# EAGLE board STMsch (EAGLE 9.5.2)
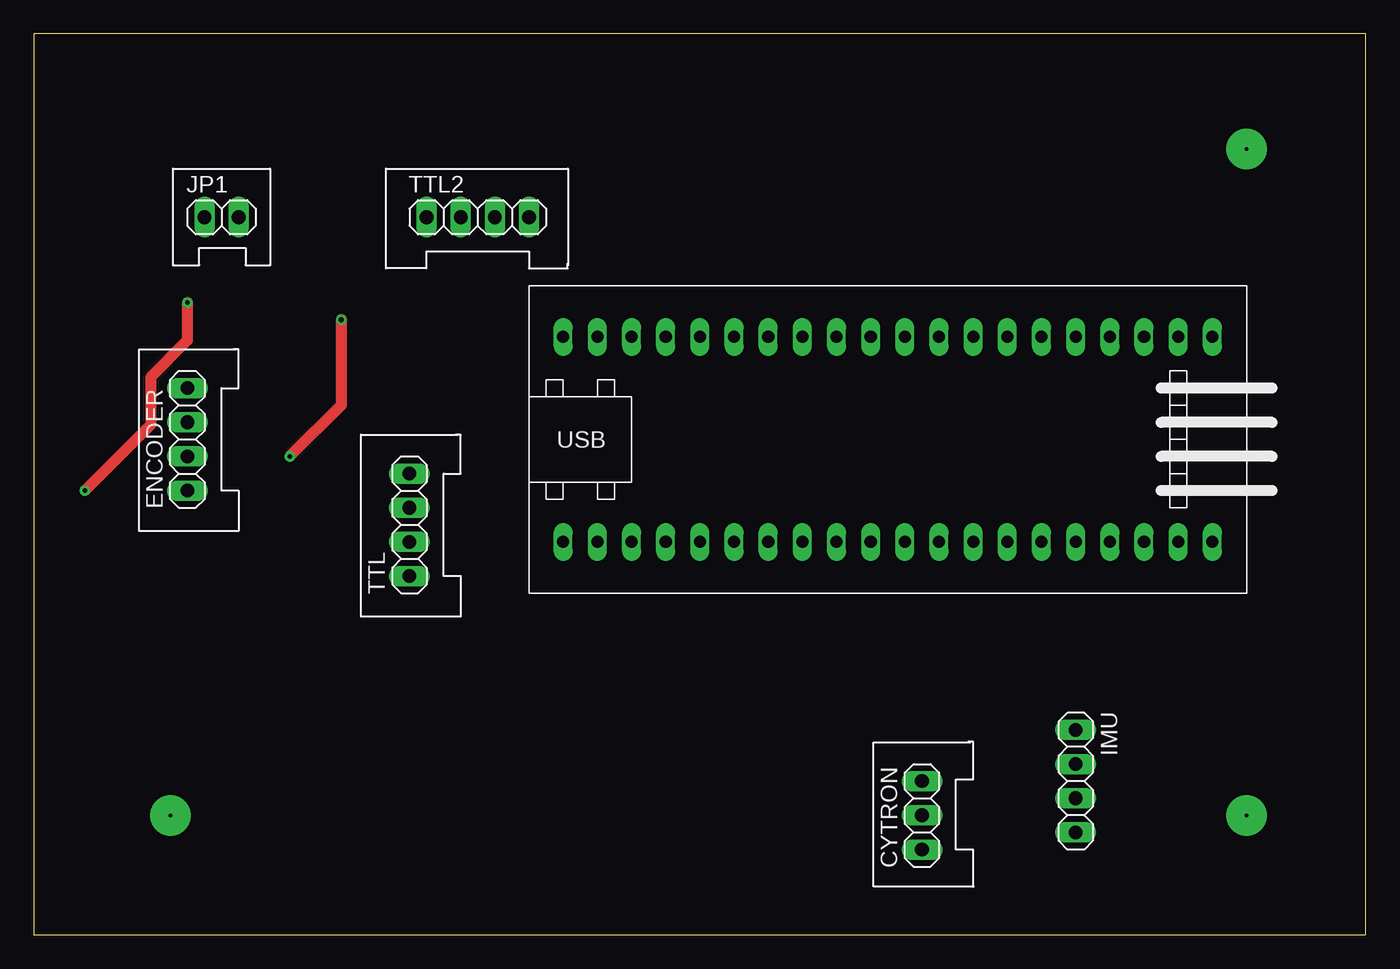
[diagram p0: board, top side]
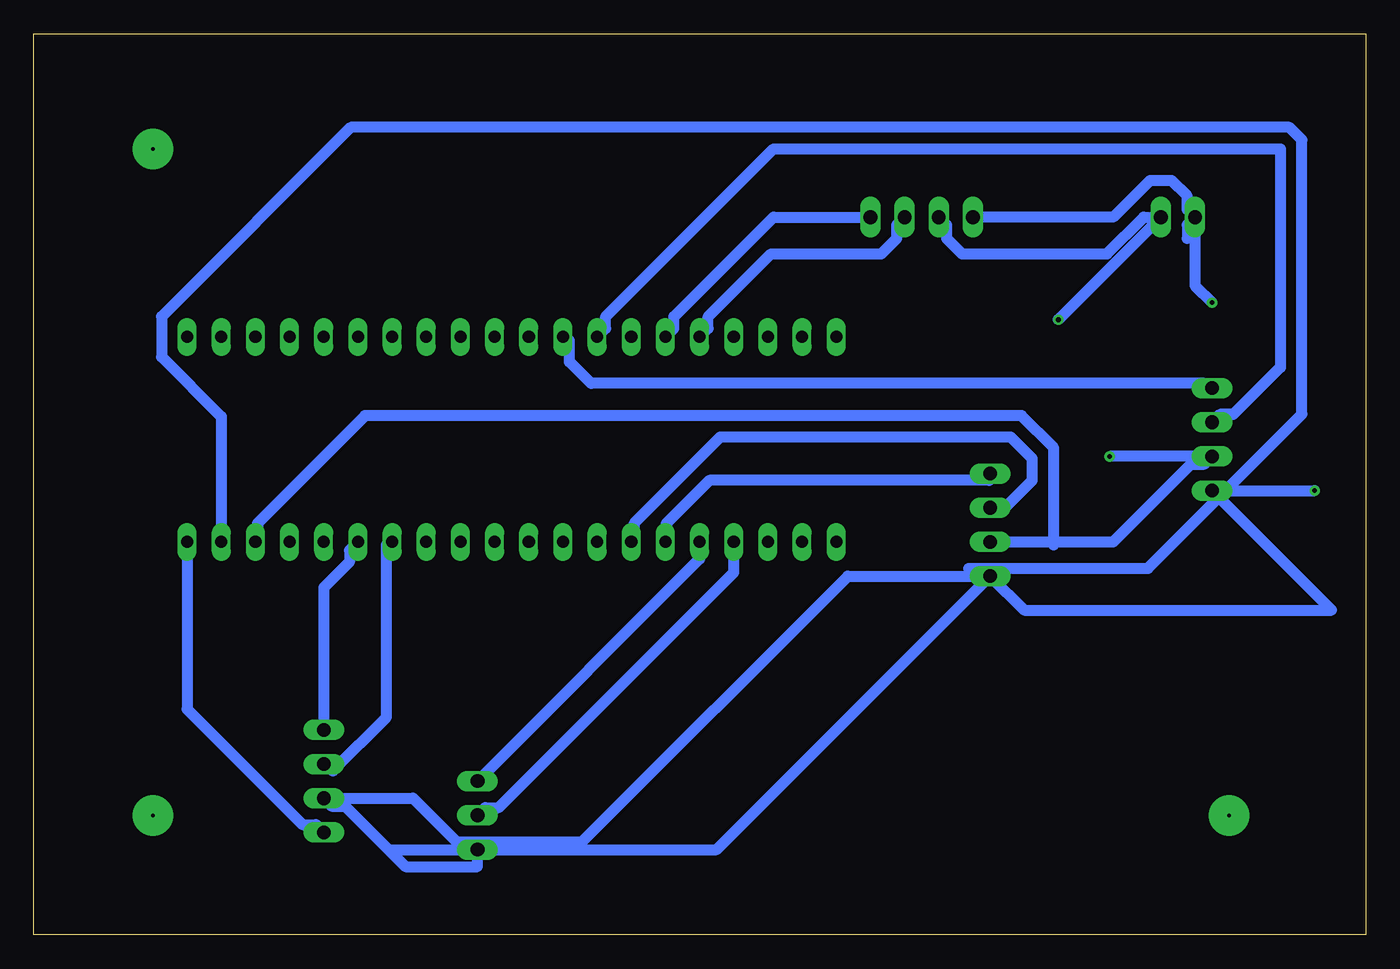
[diagram p1: board, bottom side, seen from below]

Size 99.04 x 66.98 mm. Coordinates in mm from the lower left corner, seen from the top.
Outline: 0,0 99.04,0 99.04,66.98 0,66.98 0,0
Copper layers (1*16): Top 0.035mm / dielectric 1.5mm / Bottom 0.035mm
Design rules "default *": minimum track width 0.8mm, minimum drill 0.35mm, track to track 0.8mm, track to pad 0.8mm, pad to pad 0.8mm, via to via 0.8mm, smd to smd 6mil, copper to edge 0.8mm, drill to drill 0.8mm, minimum pad ring 10mil, minimum via ring 8mil, stop-mask expansion 4mil, vias tented up to drill 0mil, thermal gap 10mil

## Footprints (pad centres in the part's own frame; a part is rotated, then mirrored left to right if it is on the bottom)
1X03_DATA = drill 1.016 long: 1 -2.54,0; 2 0,0; 3 2.54,0
1X04_DATA = drill 1.016 long: 1 -3.81,0; 2 -1.27,0; 3 1.27,0; 4 3.81,0
1X04 = drill 1.016 long: 1 -3.81,0; 2 -1.27,0; 3 1.27,0; 4 3.81,0
1X02_DATA = drill 1.016 long: 1 -1.27,0; 2 1.27,0
STM32F103C8T6-MODULE = drill 0.9 long: 3.3V_1 25.4,-7.62; 3.3V_2 -17.78,7.62; 5V 20.32,-7.62; GND_1 22.86,-7.62; GND_2 -20.32,7.62; GND_3 -22.86,7.62; PA_0 15.24,7.62; PA_1 12.7,7.62; PA_2 10.16,7.62; PA_3 7.62,7.62; PA_4 5.08,7.62; PA_5 2.54,7.62; PA_6 0,7.62; PA_7 -2.54,7.62; PA_8 -12.7,-7.62; PA_9 -10.16,-7.62; PA_10 -7.62,-7.62; PA_11 -5.08,-7.62; PA_12 -2.54,-7.62; PA_15 0,-7.62; PB_0 -5.08,7.62; PB_1 -7.62,7.62; PB_3 2.54,-7.62; PB_4 5.08,-7.62; PB_5 7.62,-7.62; PB_6 10.16,-7.62; PB_7 12.7,-7.62; PB_8 15.24,-7.62; PB_9 17.78,-7.62; PB_10 -10.16,7.62; PB_11 -12.7,7.62; PB_12 -22.86,-7.62; PB_13 -20.32,-7.62; PB_14 -17.78,-7.62; PB_15 -15.24,-7.62; PC_13 22.86,7.62; PC_14 20.32,7.62; PC_15 17.78,7.62; RESET -15.24,7.62; VB 25.4,7.62

## Placement (x,y rotation side)
CYTRON  [1X03_DATA]  66.04,8.89 90 top
ENCODER  [1X04_DATA]  11.43,36.83 90 top
IMU  [1X04]  77.47,11.43 270 top
JP1  [1X02_DATA]  13.97,53.34 0 top
TTL  [1X04_DATA]  27.94,30.48 90 top
TTL2  [1X04_DATA]  33.02,53.34 0 top
U$1  STM32F103C8T6-MODULE  [STM32F103C8T6-MODULE]  62.23,36.83 0 top

## Library data of the parts
CYTRON ENCODER IMU JP1 TTL TTL2 U$1 = MIA_LIBRARY-2-2-2

## Nets
3.3V: IMU.4 U$1.3.3V_1
3.3V1: U$1.3.3V_2
5V: ENCODER.2 JP1.2 TTL2.2 TTL.2 U$1.5V
GND: CYTRON.1 ENCODER.1 IMU.3 JP1.1 TTL2.1 TTL.1 U$1.GND_1
GND2: U$1.GND_2
GND3: U$1.GND_3
PA_0: U$1.PA_0
PA_1: U$1.PA_1
PA_2: U$1.PA_2
PA_3: U$1.PA_3
PA_4: U$1.PA_4
PA_5: U$1.PA_5
PA_6: U$1.PA_6
PA_7: ENCODER.4 U$1.PA_7
PA_8: CYTRON.3 U$1.PA_8
PA_9: TTL.4 U$1.PA_9
PA_10: TTL.3 U$1.PA_10
PA_11: U$1.PA_11
PA_12: U$1.PA_12
PA_15: U$1.PA_15
PB_0: ENCODER.3 U$1.PB_0
PB_1: U$1.PB_1
PB_3: U$1.PB_3
PB_4: U$1.PB_4
PB_5: U$1.PB_5
PB_6: IMU.2 U$1.PB_6
PB_7: IMU.1 U$1.PB_7
PB_8: U$1.PB_8
PB_9: U$1.PB_9
PB_10: TTL2.4 U$1.PB_10
PB_11: TTL2.3 U$1.PB_11
PB_12: U$1.PB_12
PB_13: U$1.PB_13
PB_14: U$1.PB_14
PB_15: CYTRON.2 U$1.PB_15
PC_13: U$1.PC_13
PC_14: U$1.PC_14
PC_15: U$1.PC_15
RESET: U$1.RESET
VB: U$1.VB

## Tracks (layer width: path | path; a pad name or v marks a point on that pad's centre or on a via)
3.3V
  Bottom 0.8: IMU.4 78.05,8.2 79.05,8.2 87.63,16.78 U$1.3.3V_1
5V  (via drill 0.35)
  Top 0.8: v22.86,45.72 22.86,39.37 v19.05,35.56
  Bottom 0.8: TTL.2 23.2,29.21 | 23.2,29.21 18.78,29.21 13.01,34.98 12.01,34.98 ENCODER.2 v19.05,35.56 | 23.2,29.21 23.2,36.19 25.6,38.59 74.4,38.59 82.4,30.59 82.4,29.79 U$1.5V | 23.2,28.99 23.2,29.21 | TTL2.2 31.17,52.76 31.17,51.77 30.02,50.62 19.24,50.62 16.51,53.34 JP1.2 v22.86,45.72
GND  (via drill 0.35)
  Top 0.8: v3.81,33.02 8.71,37.92 8.71,41.45 11.43,44.18 v11.43,46.99
  Bottom 0.8: TTL.1 25.4,24.13 2.54,24.13 ENCODER.1 | TTL2.1 18.78,53.34 16.05,56.06 14.43,56.06 13.28,54.91 13.28,53.92 JP1.1 | JP1.1 13.28,52.76 13.28,51.77 | U$1.GND_1 85.09,38.51 89.53,42.96 89.53,45.94 75.46,60.02 5.69,60.02 4.75,59.08 4.75,38.7 10.43,33.02 | 29.52,27.25 16.2,27.25 10.43,33.02 | TTL.1 48.26,6.35 CYTRON.1 66.04,5.08 71.39,5.08 72.66,6.35 | 72.66,6.35 67.31,6.35 | 72.66,6.35 75.89,9.58 76.89,9.58 IMU.3 70.85,10.16 67.61,6.93 58.26,6.93 38.51,26.67 TTL.1 | ENCODER.1 11.2,32.99 10.4,32.99 10.43,33.02 | JP1.1 12.7,48.26 v11.43,46.99 | ENCODER.1 v3.81,33.02
N$1  (via drill 0.25 pad 3)
  other vias: 10.16,8.89
N$2  (via drill 0.25 pad 3)
  other vias: 90.17,8.89
N$3  (via drill 0.25 pad 3)
  other vias: 90.17,58.42
PA_7
  Bottom 0.8: U$1.PA_7 59.2,44.19 59.2,42.59 57.6,40.99 12,40.99 ENCODER.4
PA_8
  Bottom 0.8: CYTRON.3 49.53,27.94 U$1.PA_8
PA_9
  Bottom 0.8: U$1.PA_9 52,29.79 52,30.59 48.8,33.79 28,33.79 TTL.4
PA_10
  Bottom 0.8: U$1.PA_10 54.4,29.79 54.4,30.59 48,36.99 26.4,36.99 24.8,35.39 24.8,33.79 27.2,31.39 TTL.3
PB_0
  Bottom 0.8: U$1.PB_0 56.51,45.09 56.51,45.94 44.04,58.42 6.35,58.42 6.35,42.18 9.86,38.68 10.85,38.68 ENCODER.3
PB_6
  Bottom 0.8: U$1.PB_6 72.8,28.99 72.8,16.19 76.8,12.19 IMU.2
PB_7
  Bottom 0.8: U$1.PB_7 75.57,28.57 75.57,27.72 77.47,25.81 IMU.1
PB_10
  Bottom 0.8: U$1.PB_10 51.43,45.09 51.43,45.94 44.04,53.34 TTL2.4
PB_11
  Bottom 0.8: TTL2.3 34.87,52.76 34.87,51.77 36.02,50.62 44.22,50.62 48.89,45.94 48.89,45.09 U$1.PB_11
PB_15
  Bottom 0.8: CYTRON.2 65.46,9.47 64.47,9.47 46.99,26.94 U$1.PB_15
(copper drawn outside any net)
  shapes: Top area x1